# Altium PCB GNSS Board.PcbDoc
Units mil, origin at the board's own origin, x right, y up, seen from the top; angles counter-clockwise.
Board outline 3149.61 x 3149.61 mil, 2 copper layers (Top Layer, Bottom Layer); 6 components, 6 nets, 51 pads, 159 vias.
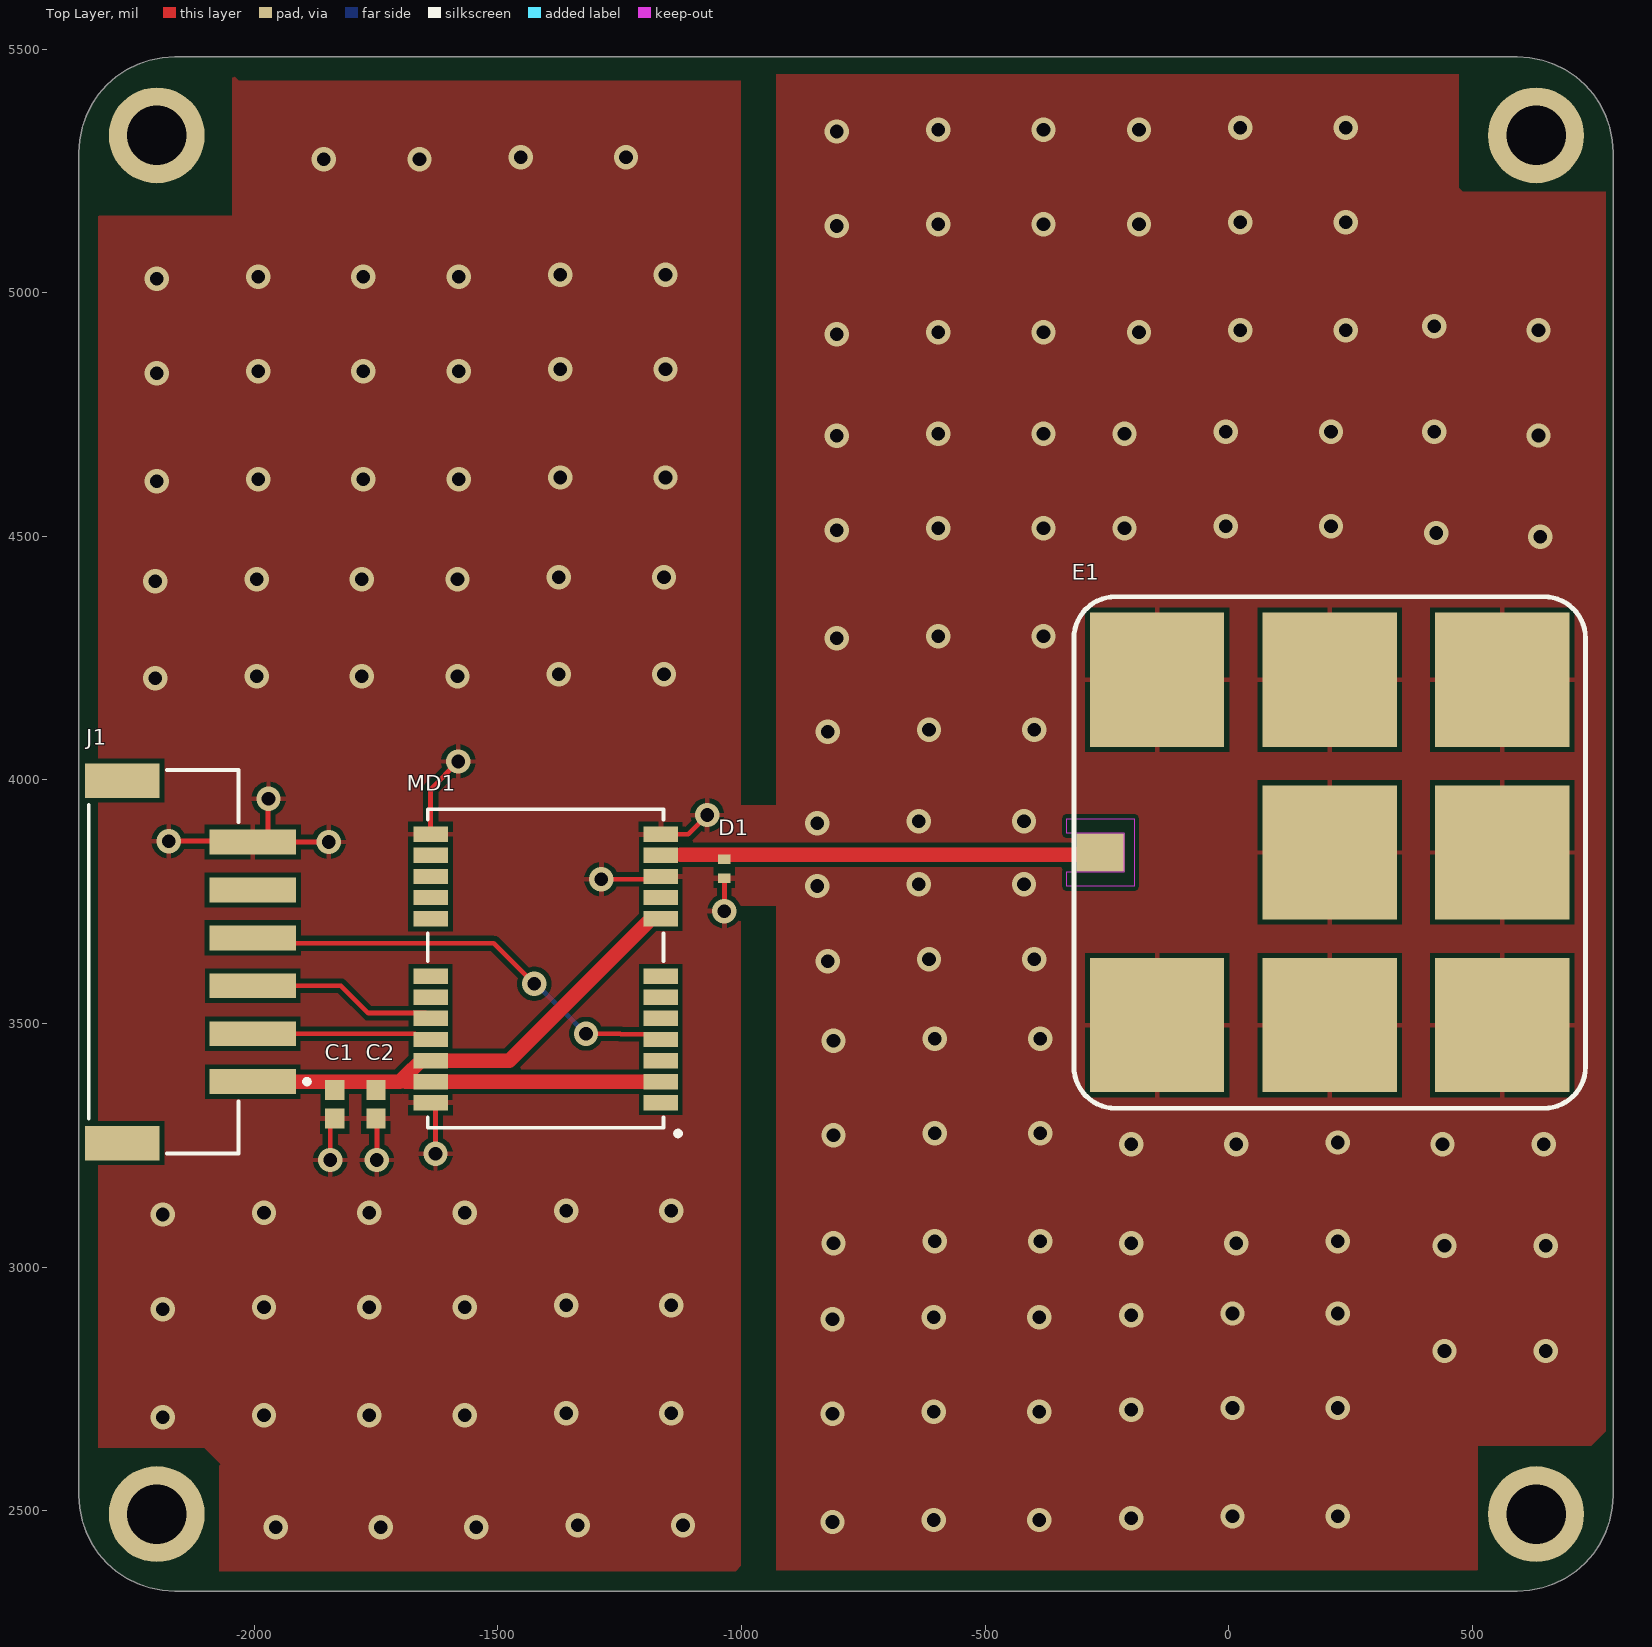
[diagram p0: Top Layer view]
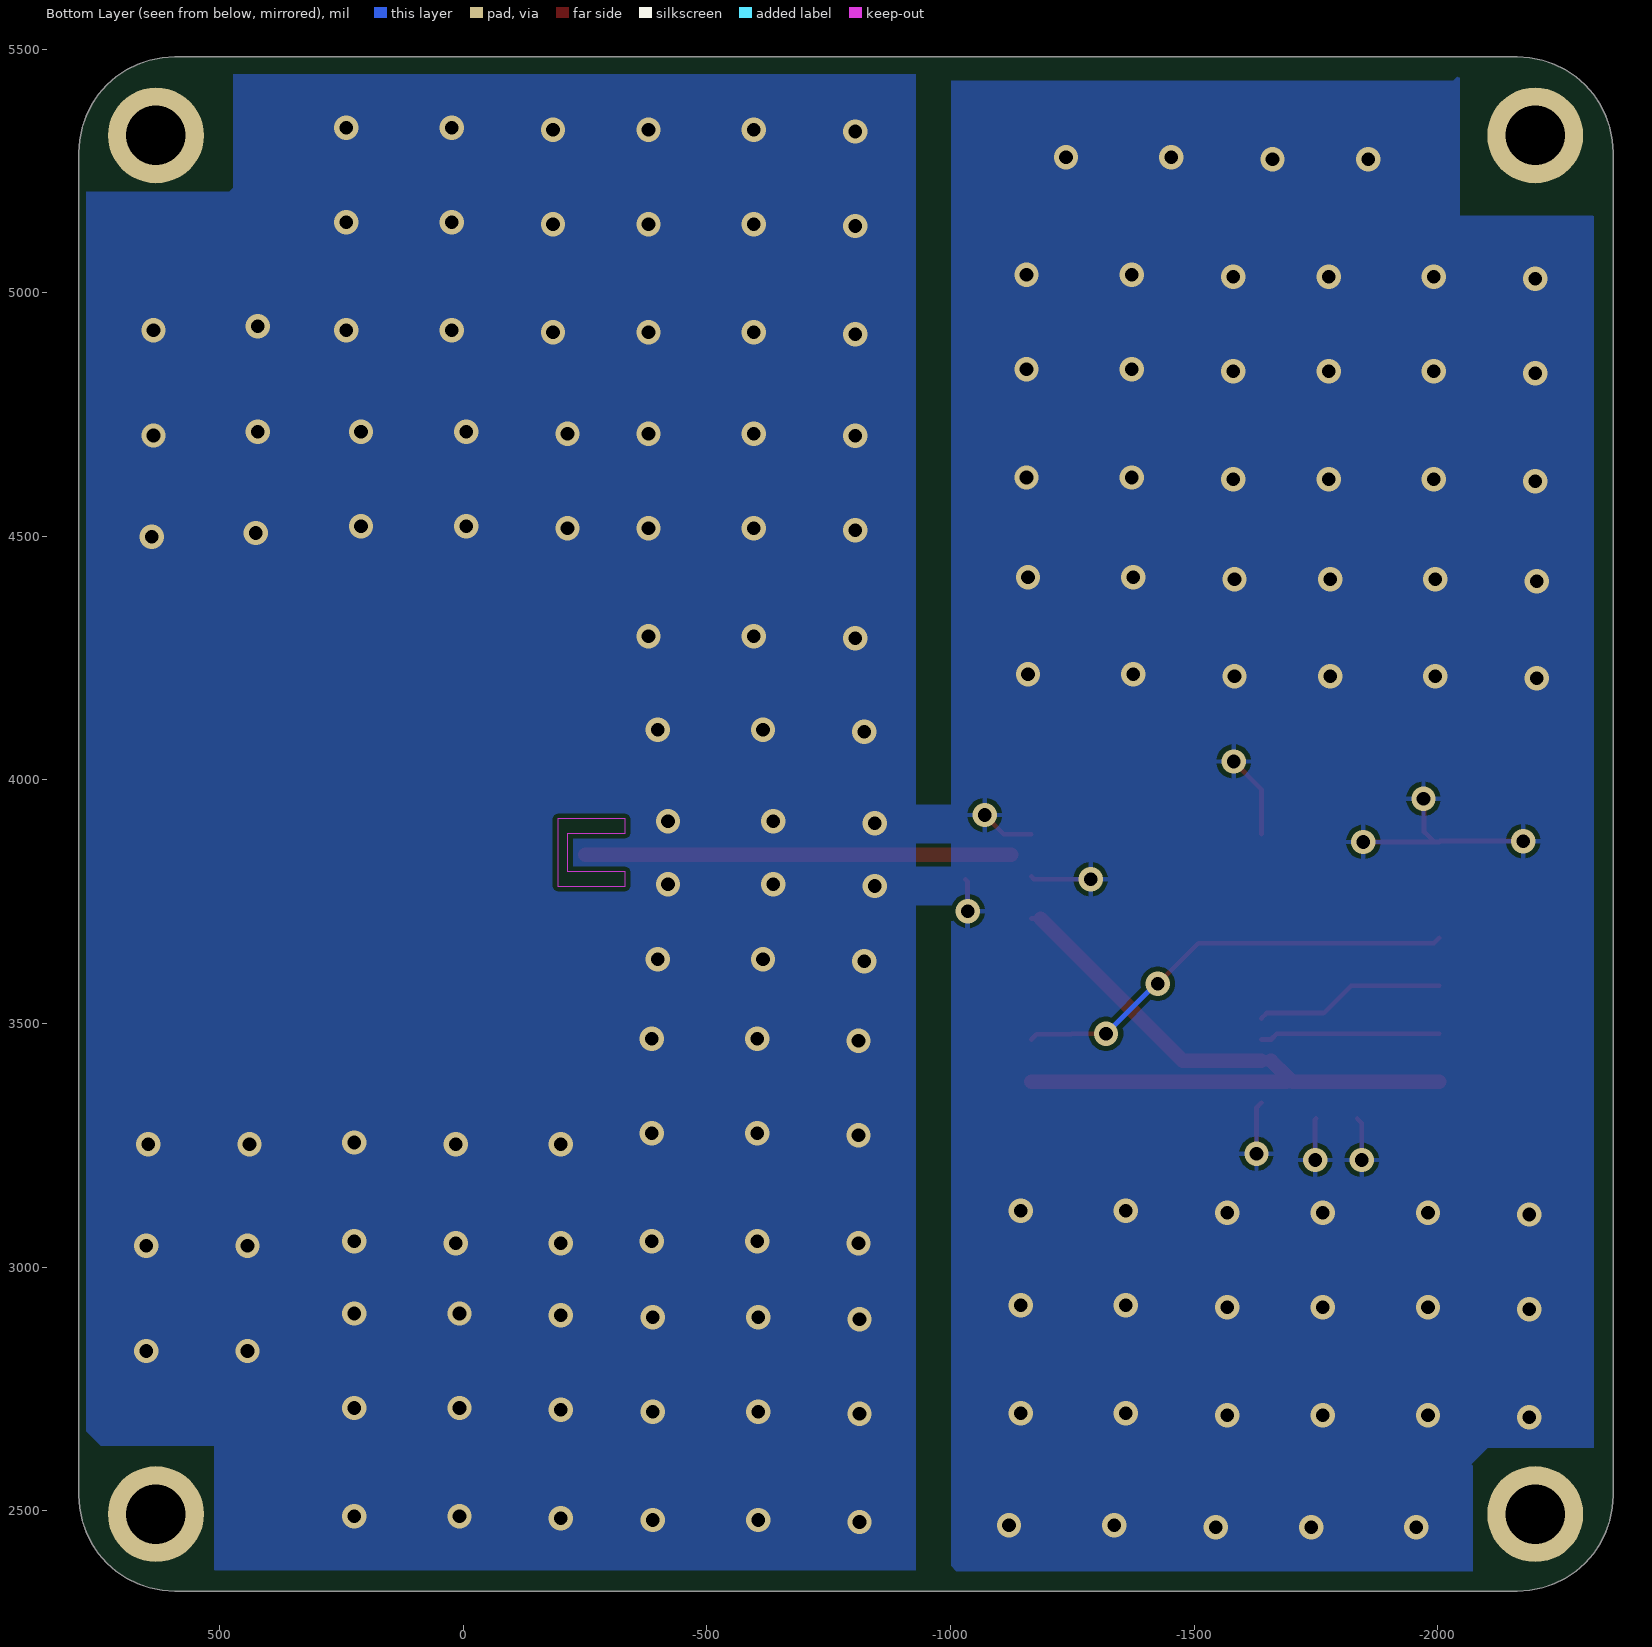
[diagram p1: Bottom Layer view, seen from below]
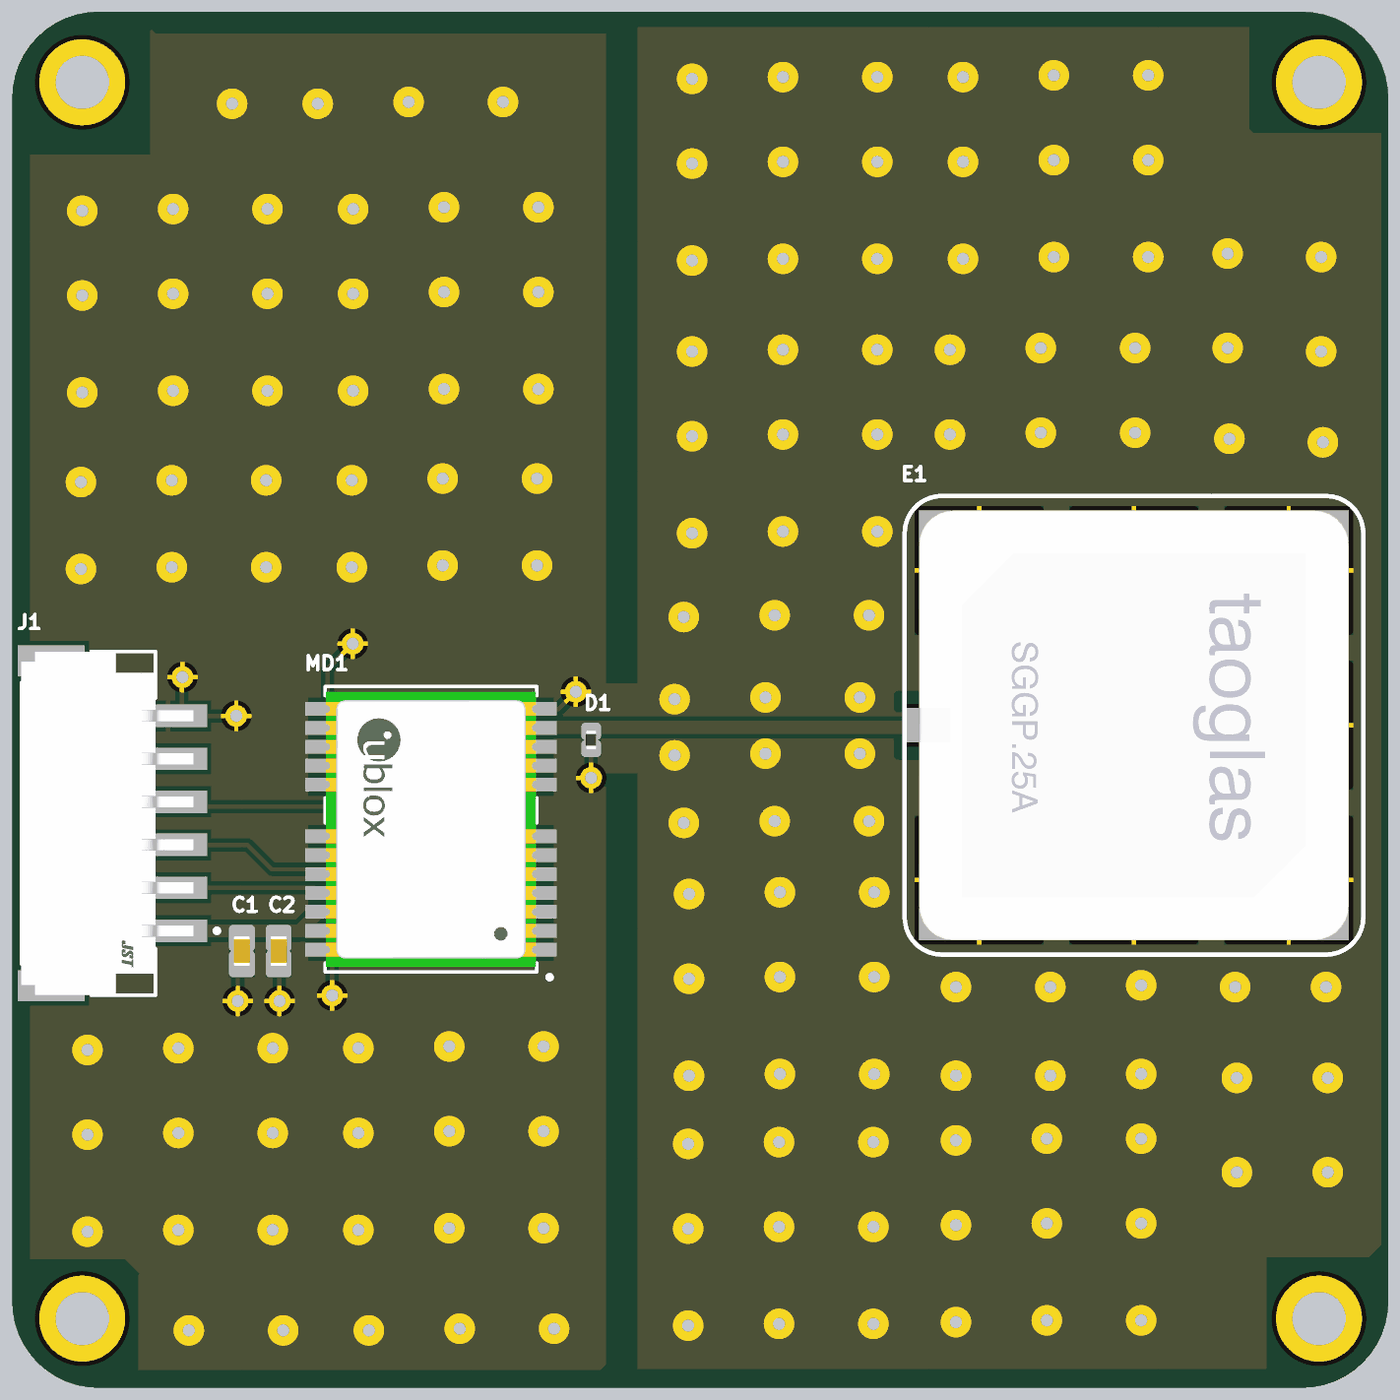
[diagram p2: 3D render of the assembled board from above, using the file's embedded part models]

## Layer stack, top to bottom
Top Solder: solder mask 0.4, Solder Resist, Dk 3.5
Top Layer: signal copper 1.4
Dielectric 1: core 12.6, FR-4, Dk 4.8
Bottom Layer: signal copper 1.4
Bottom Solder: solder mask 0.4, Solder Resist, Dk 3.5

## Board outline
-2360.15,2531.7 -2358.47,2506 -2353.45,2480.75 -2345.18,2456.36 -2333.8,2433.26 -2319.49,2411.85 -2302.51,2392.49 -2283.15,2375.51 -2261.74,2361.21 -2238.64,2349.82 -2214.25,2341.55 -2189,2336.53 -2163.3,2334.85 592.61,2334.85 618.3,2336.53 643.56,2341.55 667.95,2349.82 691.04,2361.21 712.46,2375.51 731.82,2392.49 748.8,2411.85 763.1,2433.26 774.49,2456.36 782.76,2480.75 787.78,2506 789.46,2531.7 789.46,5287.61 787.78,5313.3 782.76,5338.56 774.49,5362.95 763.1,5386.05 748.8,5407.46 731.82,5426.82 712.46,5443.8 691.04,5458.1 667.95,5469.49 643.56,5477.76 618.3,5482.78 592.61,5484.46 -2163.3,5484.46 -2189,5482.78 -2214.25,5477.76 -2238.64,5469.49 -2261.74,5458.1 -2283.15,5443.8 -2302.51,5426.82 -2319.49,5407.46 -2333.8,5386.05 -2345.18,5362.95 -2353.45,5338.56 -2358.47,5313.3 -2360.15,5287.61

## Design rules (kind name [scope] priority, off if disabled: settings)
Clearance [All] p1: gap=10 ignorepadtopadclearanceinfootprint=FALSE
HoleSize [All] p1: absolutevalues=TRUE maxlimit=300 minlimit=10 maxpercent=80.000 minpercent=20.000
MinimumAnnularRing [All] p1: minimumring=10
PasteMaskExpansion [All] p1: expansion=10
PlaneClearance [All] p1: clearance=15
PlaneConnect [All] p1: pad.planeconnectstyle=Relief pad.reliefexpansion=20 pad.reliefentries=4 pad.reliefconductorwidth=10 pad.reliefairgap=10 via.planeconnectstyle=Direct via.reliefexpansion=20 via.reliefentries=4 via.reliefconductorwidth=10 via.reliefairgap=10
PolygonConnect [All] p1: connectstyle=Relief reliefconductorwidth=10 reliefentries=4 polygonreliefangle="90 Angle" airgapwidth=10
RoutingVias [All] p1: holewidth=28 width=50 viastyle="Through Hole" minholewidth=28 minwidth=50 maxholewidth=28 maxwidth=50
SMDNeckDown [All] p1: percent=100.000
SilkToSolderMaskClearance SilkscreenOverComponentPads [IsPad] p1: minsilkscreentomaskgap=10 clearancetoexposedcopper=TRUE
SolderMaskExpansion [All] p1: expansion=10 istentingtop=FALSE
SupplyNets "Schematic Supply Nets_1" [InNet('GND')] p1: voltage=0.000
SupplyNets "Schematic Supply Nets" [InNet('+3V3')] p2: voltage=0.000
Width [All] p1: maxlimit=10 minlimit=10 preferedwidth=10
25 further rules are at their usual default settings.

## Components (designator, comment, footprint, x,y, rotation, side; value= is the part's Value field where it differs from the comment)
C1 "C0603C105K8PACTU" CAPC1608X10N -1834.67,3334.48 r90 top value=1uF
C2 "C0603C105K8PACTU" CAPC1608X10N -1750.31,3334.48 r90 top value=1uF
D1 "CGA0402MLC-05G" DIOC1005X04N -1035.11,3817.75 r90 top
E1 "SGGP.25.4.A.02" SGGP.25.4.A.02-Footprint-1 207.47,3851.21 r270 top
J1 "S6B-XH-SM4-TB(LF)(SN)" FP-S6B-XH-SM4-TB_LF_SN-MFG -2186.06,3626.8 r270 top
MD1 "NEO-M9N-00B" FP-NEO-M9N-00B-MFG -1401.78,3613.02 r270 top

## Footprints (in the part's own frame and the unit in brackets; to place one, negate y for a bottom-side part, rotate by r counter-clockwise, add the part's x,y. Pads: shape width x height; smd on the part's side, far side on the other; paste and mask are expansions set on the pad)
CAPC1608X10N [mm] "Chip Capacitor, 2-Leads, Body 1.60x0.80mm, IPC Medium Density"
  rect 1.05x1 smd: 1(-0.75,0) 2(0.75,0)
  body extent -0.87,-0.48 0.87,0.48, height 0.95
DIOC1005X04N [mm] "Chip Diode, 2-Leads, Body 1.00x0.50mm, IPC Medium Density"
  rect 0.5x0.65 smd: 1(-0.5,0) 2(0.5,0)
  body extent -0.55,-0.3 0.55,0.3, height 0.44
FP-NEO-M9N-00B-MFG [mm]
  rect 0.8x1.8 smd paste-1000 mask-1000: 1(7,6) 2(5.9,6) 3(4.8,6) 4(3.7,6) 5(2.6,6) 6(1.5,6) 7(0.4,6) 8(-2.6,6) 9(-3.7,6) 10(-4.8,6) 11(-5.9,6) 12(-7,6) 13(-7,-6) 14(-5.9,-6) 15(-4.8,-6) 16(-3.7,-6) 17(-2.6,-6) 18(0.4,-6) 19(1.5,-6) 20(2.6,-6) 21(3.7,-6) 22(4.8,-6) 23(5.9,-6) 24(7,-6)
  silkscreen extent -8.3,-6.15 8.72,7.02, body extent -8.4,-7.4 8.4,7.4, height 0.25
FP-S6B-XH-SM4-TB_LF_SN-MFG [mm]
  rect 1.3x4.5 smd paste+0 mask+0: 1(6.25,4.65) 2(3.75,4.65) 3(1.25,4.65) 4(-1.25,4.65) 5(-3.75,4.65) 6(-6.25,4.65)
  rect 1.8x3.9 smd paste+0 mask+0: 7(-9.45,-2.15) 8(9.45,-2.15)
  silkscreen extent -10,-3.9 10,7.6, body extent -10.45,-4.2 10.45,7, height 0.25
SGGP.25.4.A.02-Footprint-1 [mm]
  rect 2x2.5 smd paste+0: 1(0,-11.95)
  rect 7x7 smd paste+0: 2(-9,9) 2(-9,0) 2(-9,-9) 2(0,9) 2(0,0) 2(9,9) 2(9,0) 2(9,-9)
  Keep-Out Layer region: -1,-10.7 -1,-13.7 -1.75,-13.7 -1.75,-10.2 1.75,-10.2 1.75,-13.7 1,-13.7 1,-10.7
  silkscreen extent -13.34,-13.34 13.34,13.34, body extent -12.5,-12.51 12.5,12.5, height 4.02

## Part data
C1 C2: library part CMP-00045-1, "Cap Ceramic 1uF 10V X5R 10% SMD 0603 85°C Paper T/R", Capacitance=1uF, Case Code (Imperial)=0603, Case Code (Metric)=1608, Dielectric=X5R, Dielectric Material=Ceramic, Max Operating Temperature=85°C, Min Operating Temperature=-55°C, Package Quantity=1, Tolerance=10%, Voltage=10V, Case/Package=0603, Depth=0.8mm, Height=0.8mm, Lead Free="Lead Free", Length=1.6mm, Mount="Surface Mount", Number of Pins=2, Packaging="Tape and Reel", Radiation Hardening=No, REACH SVHC="No SVHC", Termination=SMD/SMT, Thickness=0.035inch, Voltage Rating=10V, Voltage Rating (DC)=10V, Weight=7.1E-05oz, Width=0.031inch
D1: library part CMP-00164-1, "ESD Suppressor TVS 5V Automotive 2-Pin Case 0402 T/R", Capacitance=0.2pF, Case Code (Imperial)=0402, Case Code (Metric)=1005, Clamping Voltage=30V, Current Rating=5nA, Leakage Current=10nA, Max Operating Temperature=125°C, Max Voltage Rating (DC)=5V, Min Operating Temperature=-55°C, Package Quantity=10000, Case/Package=0402, Contact Plating=Tin, Depth=0.5mm, Direction=Bidirectional, Element Configuration=Single, ESD Protection=Yes, Height=0.34mm, Length=1mm, Max Reverse Leakage Current=5nA, Mount="Surface Mount", Number of Circuits=1, Number of Pins=2, Operating Supply Voltage=5V, Packaging="Tape and Reel", Radiation Hardening=No, REACH SVHC="No SVHC", Termination=SMD/SMT, Voltage Rating (DC)=5V, Width=0.5mm, Working Voltage=5V
E1: library part CMP-00032-2, "ANTENNA GPS CERAMIC PATCH SMD", Case/Package=SMD/SMT, Max Frequency=1.607GHz, Package Quantity=200, Height=0.177inch, Impedance=50R, Mount="Surface Mount", Number of Bands=2, Termination=Solder
J1: library part CMP-17439-000164-1, "CONN HEADER SMD R/A 6POS 2.5MM", Color=Natural, Contact Resistance=20mR, Flammability Rating="UL94 V-0", Housing Color=Beige, Max Current Rating=3A, Max Operating Temperature=85°C, Max Voltage Rating (AC)=250V, Min Operating Temperature=-25°C, Package Quantity=1, Connector Type=Header, Contact Finish - Mating=TIN, Contact Material="Copper Alloy", Contact Plating=Copper, Contact Shape=Square, Contact Type="Male Pin", Depth=7mm, Fastening Type=Detent, Gender=Male, Housing Material=Polyamide, Insulation Color=Natural, Insulation Material=Nylon, Lead Free="Lead Free", Length=20mm, Mount="Surface Mount", Number Of Contacts=6, Number of Positions=6, Number of Rows=1, Orientation="Right Angle", Packaging="Tape and Reel", Pitch=2.5mm, REACH SVHC="No SVHC", Series=XH, Termination=Solder, Voltage Rating=250V
MD1: library part CMP-207130-000006-2, "M9 standard precision module", Manufacturer=u-blox, Max Supply Voltage=3.6V, Min Supply Voltage=1.65V, Package=0, Temperature="-40°C to +85°C", Temperature Range High=+85°C, Temperature Range Low=-40°C, Automotive=No, Category=UNK, ComponentLink2Description=Datasheet, ComponentLink2URL=https://www.u-blox.com/sites/default/files/NEO-M9N_DataSheet_%28UBX-19014285%29.pdf, Device Class L1="Integrated Circuits (ICs)", Device Class L2="RF Semiconductors and Devices", Device Class L3="RF Receivers", Footprint Url=https://www.u-blox.com/sites/default/files/NEO-M9N_Integrationmanual_%28UBX-19014286%29.pdf, Height=2.6mm, Interface=I2C,SPI,UART,USB, Lead Free=Yes, Manufacturer Part Number=NEO-M9N-00B, Octopart=https://octopart.com/neo-m9n-00b-u-blox-107315722, RoHS=TRUE, Sensitivity=-167dBm

## Free pads (board coordinates)
  round 196.85 hole 122.05: MOUNT(-2200.01,2493) MOUNT(-2200.01,5323) MOUNT(630.99,2493) MOUNT(630.99,5323)

## Via types
v1: diameter 50, hole 28, Top Layer to Bottom Layer, 159 vias

## Nets (pads, with @x,y where several pads share a name; then routed paths per layer and width w, separated by ;. In a path a pad name is that pad's centre, name@x,y a point inside that pad or via, vN(x,y) a via of type N, cw(c..) or ccw(c..) an arc to the next point about the centre after c; other vN are vias at no path point)
+3V3: C1.2 C2.2 J1.1 MD1.2 MD1.8 MD1.22 MD1.23 | length 1499.7
  Top Layer w10: MD1.22@-1657.69,3424.05 MD1.22 ; MD1.8@-1185.24,3715.39 MD1.8
  Top Layer w30: J1.1 -1700.99,3380.74 -1689.18,3392.55 MD1.22@-1657.69,3424.05 ; -1689.18,3380.74 MD1.23 MD1.2 ; MD1.22 -1476.58,3424.05 MD1.8@-1185.24,3715.39
GND: C1.1 C2.1 D1.1 E1.2 J1.6 MD1.10 MD1.12 MD1.13 MD1.24 | length 1198.3
  Top Layer w10: v1(-2175.44,3874.51) -2004.62,3874.51 J1.6 ; v1@-1972.07,3963.75 -1972.07,3893.46 -1992.66,3872.87 J1.6 ; v1(-1847.38,3872.8) -2002.92,3872.8 J1.6 ; v1(-1844,3220) -1844,3295.63 C1.1 ; C2.1 -1748.35,3302.98 v1(-1748.35,3220) ; MD1.24 -1627.88,3327.31 v1(-1627.88,3232.77) ; MD1.13 -1638,3981 v1(-1581,4038) ; v1(-1287.42,3796.32) -1171.24,3796.32 MD1.10 ; MD1.12 -1109.39,3888.61 v1(-1070,3928) ; v1(-1035.11,3730.91) -1035.11,3791.17 D1.1@-1030.18,3796.09
  other v1: -1956.03,2466 -1740.03,2466 -1543.94,2466 -1335.94,2470 -1119.94,2470 -813,2477 -605,2481 -389,2481 -200,2485 8,2489 224,2489 -2188,2692 -1980,2696 -1764,2696 -1567.91,2696 -813,2699 -1359.91,2700 -1143.91,2700 -605,2703 -389,2703 -200,2707 8,2711 224,2711 443,2828 651.12,2828 -813,2893 -605,2897 -389,2897 -200,2901 8,2905 224,2905 -2188,2914 -1980,2918 -1764,2918 -1567.91,2918 -1359.91,2922 -1143.91,2922 443,3044 651.12,3044 -811,3049 -200,3049 16,3049 -603,3053 -387,3053 224,3053 -2188,3108 -1980,3112 -1764,3112 -1567.91,3112 -1359.91,3116 -1143.91,3116 -200,3252 16,3252 439,3252 647.12,3252 224,3256 -811,3271 -603,3275 -387,3275 -811,3465 -603,3469 -387,3469 -823,3627.79 -615,3631.79 -399,3631.79 -844,3782.32 -636,3786.32 -420,3786.32 -844,3911 -636,3915 -420,3915 -1970.59,3961.38 -823,4099 -615,4103 -399,4103 -2203,4209 -1995,4213 -1779,4213 -1582.91,4213 -1374.91,4217 -1158.91,4217 -804,4290.86 -596,4294.86 -380,4294.86 -2203,4408 -1995,4412 -1779,4412 -1582.91,4412 -1374.91,4416 -1158.91,4416 640,4499 426,4507 -804,4512.86 -596,4516.86 -380,4516.86 -213.79,4516.86 -5.79,4520.86 210.21,4520.86 -2200,4613 -1992,4617 -1776,4617 -1579.91,4617 -1371.91,4621 -1155.91,4621 -804,4706.86 636,4707 -596,4710.86 -380,4710.86 -213.79,4710.86 -5.79,4714.86 210.21,4714.86 422,4715 -2200,4835 -1992,4839 -1776,4839 -1579.91,4839 -1371.91,4843 -1155.91,4843 -804,4915 -596,4919 -380,4919 -183.91,4919 24.09,4923 240.09,4923 636,4923 422,4931 -2200,5029 -1992,5033 -1776,5033 -1579.91,5033 -1371.91,5037 -1155.91,5037 -804,5137 -596,5141 -380,5141 -183.91,5141 24.09,5145 240.09,5145 -1857,5274 -1660.91,5274 -1452.91,5278 -1236.91,5278 -804,5331 -596,5335 -380,5335 -183.91,5335 24.09,5339 240.09,5339
NetD1_2: D1.2 E1.1 MD1.11 | length 874.2
  Top Layer w30: -1124.2,3846.31 -972,3846.31 -820,3846.31 E1.1@-250,3846.31
Rx: J1.2 MD1.21 | length 369.9
  Top Layer w10: J1.2 -1669.5,3479.17 -1657.69,3467.35 MD1.21
Tx: J1.3 MD1.20 | length 392.7
  Top Layer w10: J1.3 -1822.01,3577.59 -1765.83,3521.41 -1648.75,3521.41 MD1.20
WAKE: J1.4 MD1.4 | length 923.9
  Top Layer w10: J1.4 -1991.97,3665 -1508.44,3665 v1(-1425.22,3581.79) ; v1(-1319,3479.17) -1248.79,3479.17 -1247.73,3478.1 -1176.31,3478.1 MD1.4
  Bottom Layer w10: v1(-1425.22,3581.79) -1421.62,3581.79 v1(-1319,3479.17)
pads on no net: J1.5 J1.7 J1.8 MD1.1 MD1.3 MD1.5 MD1.6 MD1.7 MD1.9 MD1.14 MD1.15 MD1.16 MD1.17 MD1.18 MD1.19

## Polygon pours and split planes (outlines as drawn)
GND on Bottom Layer "GND_L02_P008" (solid, pour order 8): -1021.83,3822.48 -1021.44,3822.1 -890.41,3822.1 -890.41,3742.9 -1021.83,3742.9
GND on Bottom Layer "GND_L02_P007" (solid, pour order 7): -1031.51,3949.87 -1031.12,3949.49 -900.09,3949.49 -900.09,3870.29 -1031.51,3870.29
GND on Bottom Layer "GND_L02_P004" (solid, pour order 4): -2320,5160 -2318,5158 -2045,5158 -2045,5448 -2032,5435 -1001,5435 -1001,2387 -1012,2376 -2072,2376 -2072,2592 -2069,2595 -2103,2629 -2320,2629 -2320,5160 -2317,5163
GND on Bottom Layer "GND_L02_P000" (solid, pour order 0): -929,5449 -929,2378 510,2378 511,2379 511,2633 744,2633 774,2663 774,5207 481,5207 472,5216 472,5449
GND on Top Layer "GND_L01_P006" (solid, pour order 6): -1027.9,3821.2 -1027.52,3820.82 -896.48,3820.82 -896.48,3741.61 -1027.9,3741.61
GND on Top Layer "GND_L01_P005" (solid, pour order 5): -1037.9,3948.26 -1037.52,3947.87 -906.48,3947.87 -906.48,3868.67 -1037.9,3868.67
GND on Top Layer "GND_L01_P003" (solid, pour order 3): -2320,5160 -2318,5158 -2045,5158 -2045,5448 -2032,5435 -1001,5435 -1001,2387 -1012,2376 -2072,2376 -2072,2592 -2069,2595 -2103,2629 -2320,2629 -2320,5160 -2317,5163
GND on Top Layer "GND_L01_P002" (solid, pour order 2): -929,5449 -929,2378 510,2378 511,2379 511,2633 744,2633 774,2663 774,5207 481,5207 472,5216 472,5449